# EAGLE board pcb project (EAGLE 9.4.0)
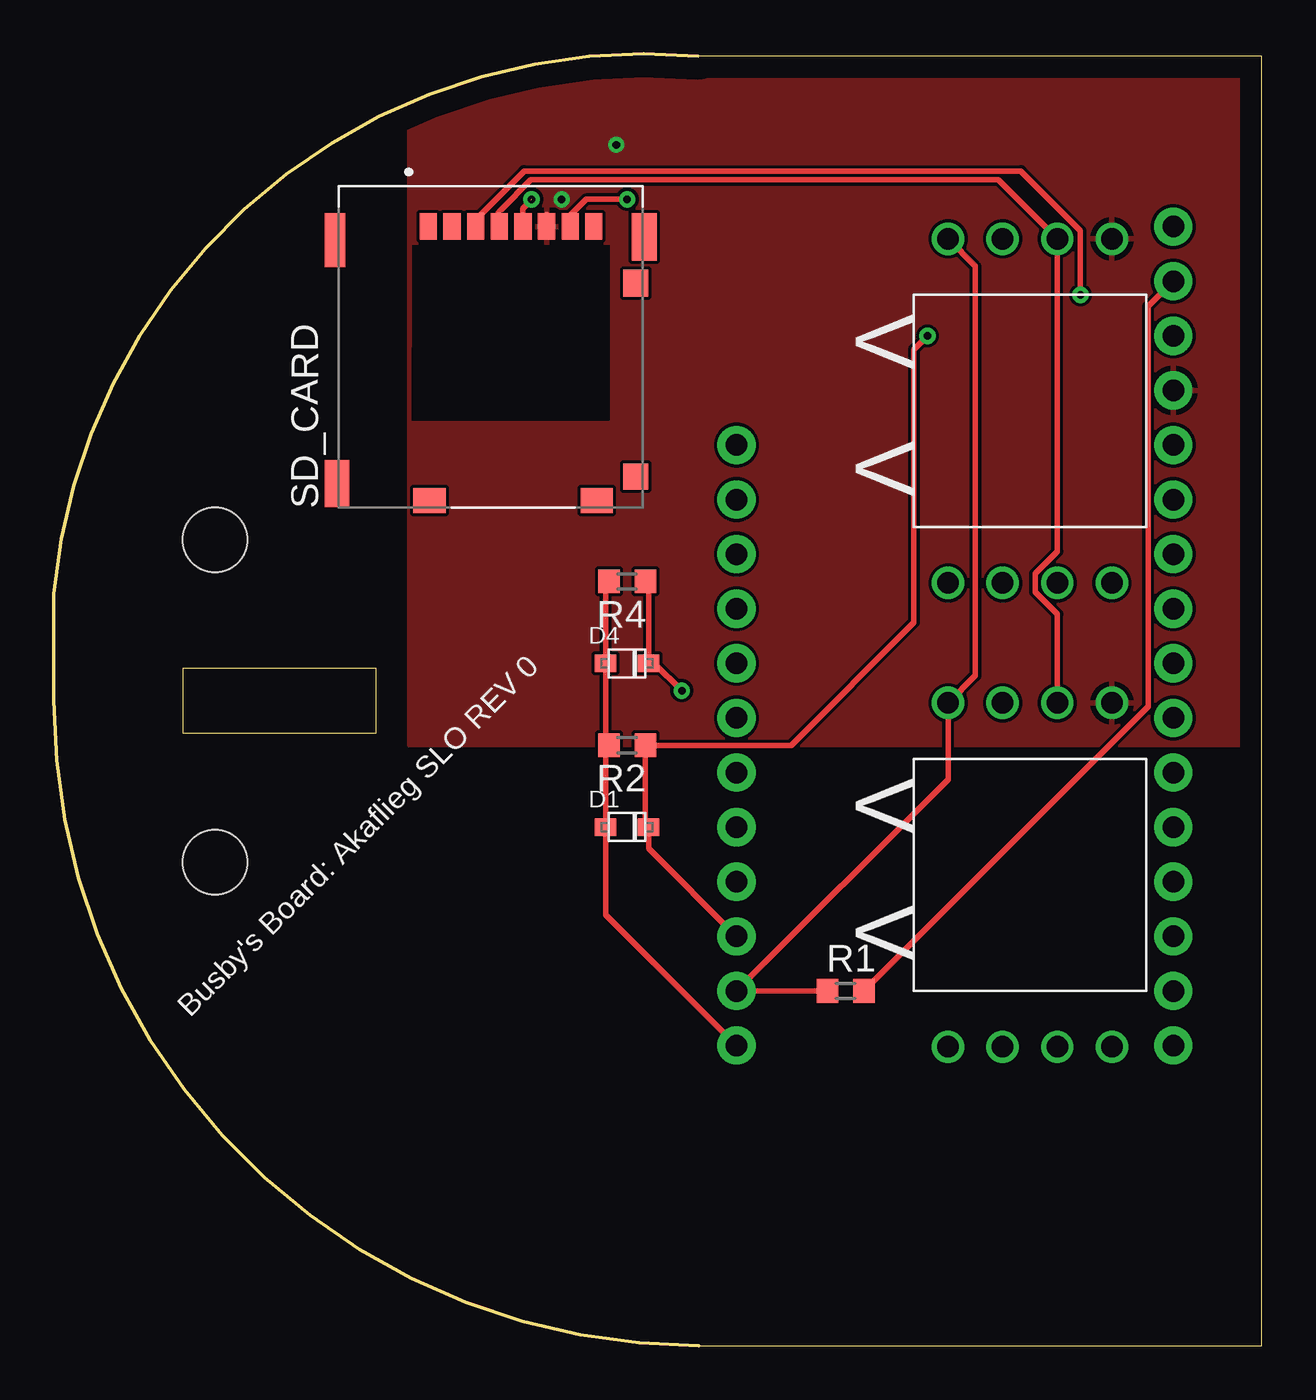
[diagram p0: board, top side]
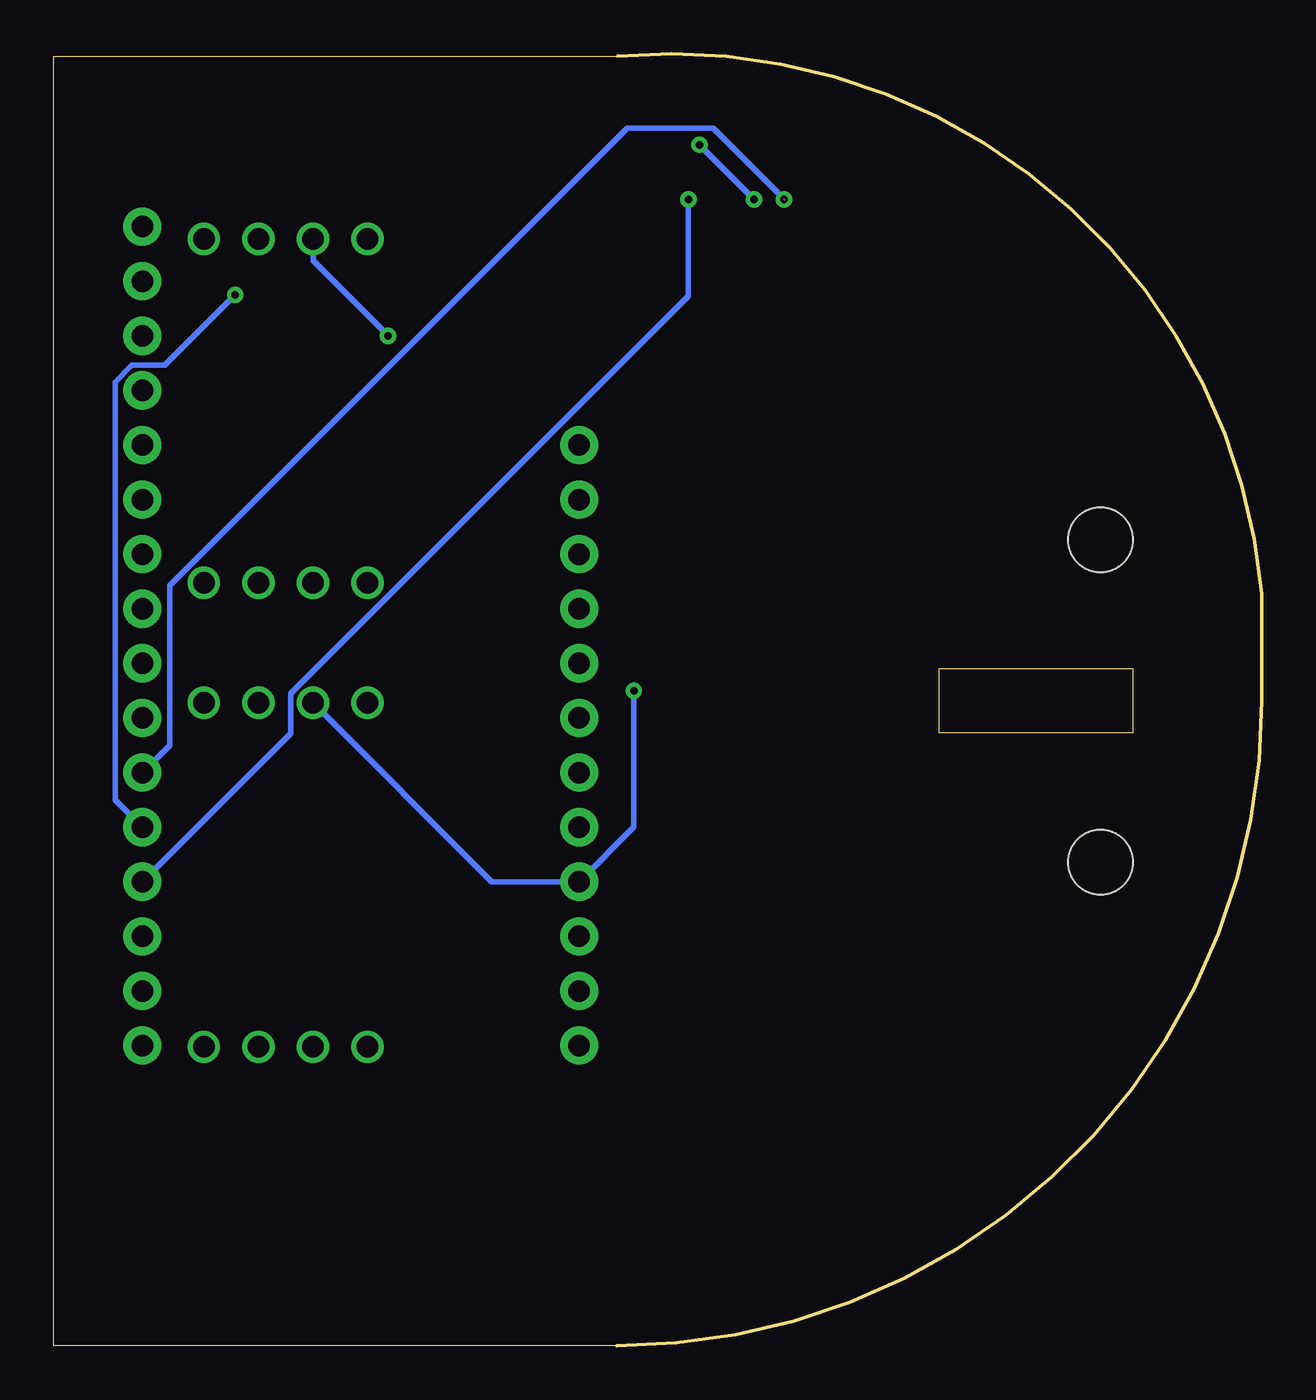
[diagram p1: board, bottom side, seen from below]

Size 56.19 x 60.11 mm. Coordinates in mm from the lower left corner, seen from the top.
Outline: 30,0 56.19,0 56.19,60 30,60 arc90 0,35 0,30 arc90 30,0
Copper layers (1*16): Top 0.035mm / dielectric 1.5mm / Bottom 0.035mm
Design rules "default": minimum track width 6mil, minimum drill 0.35mm, track to track 6mil, track to pad 6mil, pad to pad 6mil, via to via 6mil, smd to smd 6mil, copper to edge 40mil, drill to drill 6mil, minimum pad ring 10mil, minimum via ring 8mil, stop-mask expansion 4mil, vias tented up to drill 0mil, thermal gap 10mil
Net classes: 0 default: width 0.127 mm, drill 0.254 mm, clearance 0.127 mm
Holes 3 mm at 7.5,37.5 7.5,22.5
Milling: area 6,28.5 to 15,31.5

## Footprints (pad centres in the part's own frame; a part is rotated, then mirrored left to right if it is on the bottom)
SOD-323F = smd 1 x 0.8: A -1,0; C 1,0
DLLR-L10G-E1BD-C-NAV8 = drill 1: 1 13.399,1.587; 2 13.399,4.128; 3 13.399,6.668; 4 13.399,9.207; 5 -2.603,9.207; 6 -2.603,6.668; 7 -2.603,4.128; 8 -2.603,1.587
FEATHERWING = drill 1 pad 1.778: 1 6.35,1.27; 2 8.89,1.27; 3 11.43,1.27; 4 13.97,1.27; 5 16.51,1.27; 6 19.05,1.27; 7 21.59,1.27; 8 24.13,1.27; 9 26.67,1.27; 10 29.21,1.27; 11 31.75,1.27; 12 34.29,1.27; 13 36.83,1.27; 14 39.37,1.27; 15 41.91,1.27; 16 44.45,1.27; 17 44.45,21.59; 18 41.91,21.59; 19 39.37,21.59; 20 36.83,21.59; 21 34.29,21.59; 22 31.75,21.59; 23 29.21,21.59; 24 26.67,21.59; 25 24.13,21.59; 26 21.59,21.59; 27 19.05,21.59; 28 16.51,21.59
R0603 = smd 1 x 1.1: 1 -0.85,0; 2 0.85,0
MOLEX_503182-1852 = smd 0.8 x 1.24: 1 -2.9,6.355; 2 -1.8,6.355; 3 -0.7,6.355; 4 0.4,6.355; 5 1.5,6.355; 6 2.6,6.355; 7 3.7,6.355; 8 4.8,6.355 | smd 1.16 x 1.2: DT 6.74,-5.275 | smd 0.95 x 2.5: P1 -7.245,5.725 | smd 1.15 x 2.2: P2 7.145,5.875; P3 -7.145,-5.605 | smd 1.5 x 1.15: P4 -2.84,-6.4; P5 4.94,-6.4 | smd 1.16 x 1.25: SW 6.74,3.725

## Placement (x,y rotation side)
D1  [SOD-323F]  26.67,24.13 0 top
D4  [SOD-323F]  26.67,31.75 0 top
DLLR-L10G-E1BD-C-NAV8_BOT  DLLR-L10G-E1BD-C-NAV8_BOT  [DLLR-L10G-E1BD-C-NAV8]  50.8,38.1 90 top
DLLR-L10G-E1BD-C-NAV8_TOP  DLLR-L10G-E1BD-C-NAV8_TOP  [DLLR-L10G-E1BD-C-NAV8]  50.8,16.51 90 top
MS1  FEATHERWING  [FEATHERWING]  53.34,58.42 270 bottom
R1  1k  [R0603]  36.83,16.51 0 top
R2  2k  [R0603]  26.67,27.94 180 top
R4  2k  [R0603]  26.67,35.56 180 top
SD_CARD  503182-1852  [MOLEX_503182-1852]  20.32,45.72 0 top

## Library data of the parts
D1 D4 R1 R2 R4 = adafruit
DLLR-L10G-E1BD-C-NAV8_BOT DLLR-L10G-E1BD-C-NAV8_TOP = DLLR_L10G_E1BD_C_NAV8
MS1 = superioradafruit
SD_CARD = 503182-1852; DESCRIPTION: 10 _8 + 2_ Position Card Connector microSD™ Surface Mount, Right Angle Gold; DIGI-KEY_PART_NUMBER: WM12834CT-ND; DIGI-KEY_PURCHASE_URL: https://www.digikey.com/product-detail/en/molex/5031821852/WM12834CT-ND/5823232?utm_source=snapeda&utm_medium=aggregator&utm_campaign=symbol; MF: Molex; MP: 5031821852; PACKAGE: None

## Nets
3V: MS1.2 R1.2
GND: DLLR-L10G-E1BD-C-NAV8_BOT.1 DLLR-L10G-E1BD-C-NAV8_TOP.1 MS1.4 SD_CARD.6
MISO: MS1.13 SD_CARD.7
MOSI: MS1.12 SD_CARD.3
N$2: D1.C DLLR-L10G-E1BD-C-NAV8_BOT.3 MS1.19 R2.1
SCK: MS1.11 SD_CARD.5
SCL: DLLR-L10G-E1BD-C-NAV8_BOT.4 DLLR-L10G-E1BD-C-NAV8_TOP.4 MS1.18 R1.1
SDA: D1.A D4.A MS1.17 R2.2 R4.2
TOP_DIS: D4.C DLLR-L10G-E1BD-C-NAV8_TOP.3 MS1.20 R4.1
VCC: DLLR-L10G-E1BD-C-NAV8_BOT.2 DLLR-L10G-E1BD-C-NAV8_TOP.2 SD_CARD.4

## Tracks (layer width: path | path; a pad name or v marks a point on that pad's centre or on a via)
3V
  Top 0.254: MS1.2 50.9,48.36 50.9,29.73 R1.2
GND  (via drill 0.35)
  Top 0.254: SD_CARD.6 22.92,52.64 | v23.62,53.34 23.66,53.38
  Bottom 0.254: v23.62,53.34 v26.16,55.88
  pour Top: 16.51,63.5 71.12,63.5 71.12,27.94 16.51,27.94
MISO  (via drill 0.35)
  Top 0.254: SD_CARD.7 24.02,52.59 24.77,53.34 v26.67,53.34
  Bottom 0.254: MS1.13 45.17,28.49 45.17,30.34 26.67,48.83 v26.67,53.34
MOSI  (via drill 0.35)
  Top 0.254: SD_CARD.3 19.46,52.23 21.88,54.65 44.98,54.65 47.75,51.88 v47.75,48.9
  Bottom 0.254: v47.75,48.9 51.03,45.62 52.55,45.62 53.34,44.83 53.34,25.4 MS1.12
N$2  (via drill 0.35)
  Top 0.254: MS1.19 27.67,23.13 D1.C 27.52,24.28 R2.1 34.29,27.94 40.01,33.66 40.01,46.35 v40.64,46.99
  Bottom 0.254: DLLR-L10G-E1BD-C-NAV8_BOT.3 44.13,50.48 v40.64,46.99
SCK  (via drill 0.35)  (1 unrouted)
  Top 0.254: 22.2,53.3 21.82,52.91 SD_CARD.5
  Bottom 0.254: v22.23,53.34 25.53,56.64 29.53,56.64 50.8,35.37 50.8,27.94 MS1.11 52.07,26.57
SCL
  Top 0.254: R1.1 MS1.18 41.59,26.35 DLLR-L10G-E1BD-C-NAV8_TOP.4 42.86,31.18 42.86,50.23 DLLR-L10G-E1BD-C-NAV8_BOT.4
SDA
  Top 0.152: 25.67,35.41 R4.2 | 25.67,27.79 R2.2
  Top 0.254: 25.67,35.41 D4.A 25.67,28.09 R2.2 | 25.67,27.79 D1.A 25.67,20.05 MS1.17
TOP_DIS  (via drill 0.35)
  Top 0.254: R4.1 27.67,35.41 D4.C 27.94,31.75 v29.21,30.48
  Bottom 0.254: DLLR-L10G-E1BD-C-NAV8_TOP.3 35.81,21.59 MS1.20 29.21,24.13 v29.21,30.48
VCC
  Top 0.254: DLLR-L10G-E1BD-C-NAV8_TOP.2 46.67,34.03 45.64,35.07 45.64,35.92 46.67,36.96 DLLR-L10G-E1BD-C-NAV8_BOT.2 43.93,54.24 22.19,54.24 20.8,52.86 20.75,52.8 20.68,52.73 20.68,52.12 SD_CARD.4

## Text on the board
tPlace: Busby's Board: Akaflieg SLO REV 0